# Altium PCB driverV1.1.PcbDoc (part 2 of 2)
Units mil, origin at the board's own origin, x right, y up, seen from the top; angles counter-clockwise.
Board outline 6000 x 4000 mil, 2 copper layers (Top Layer, Bottom Layer); 175 components, 117 nets, 501 pads, 586 vias.
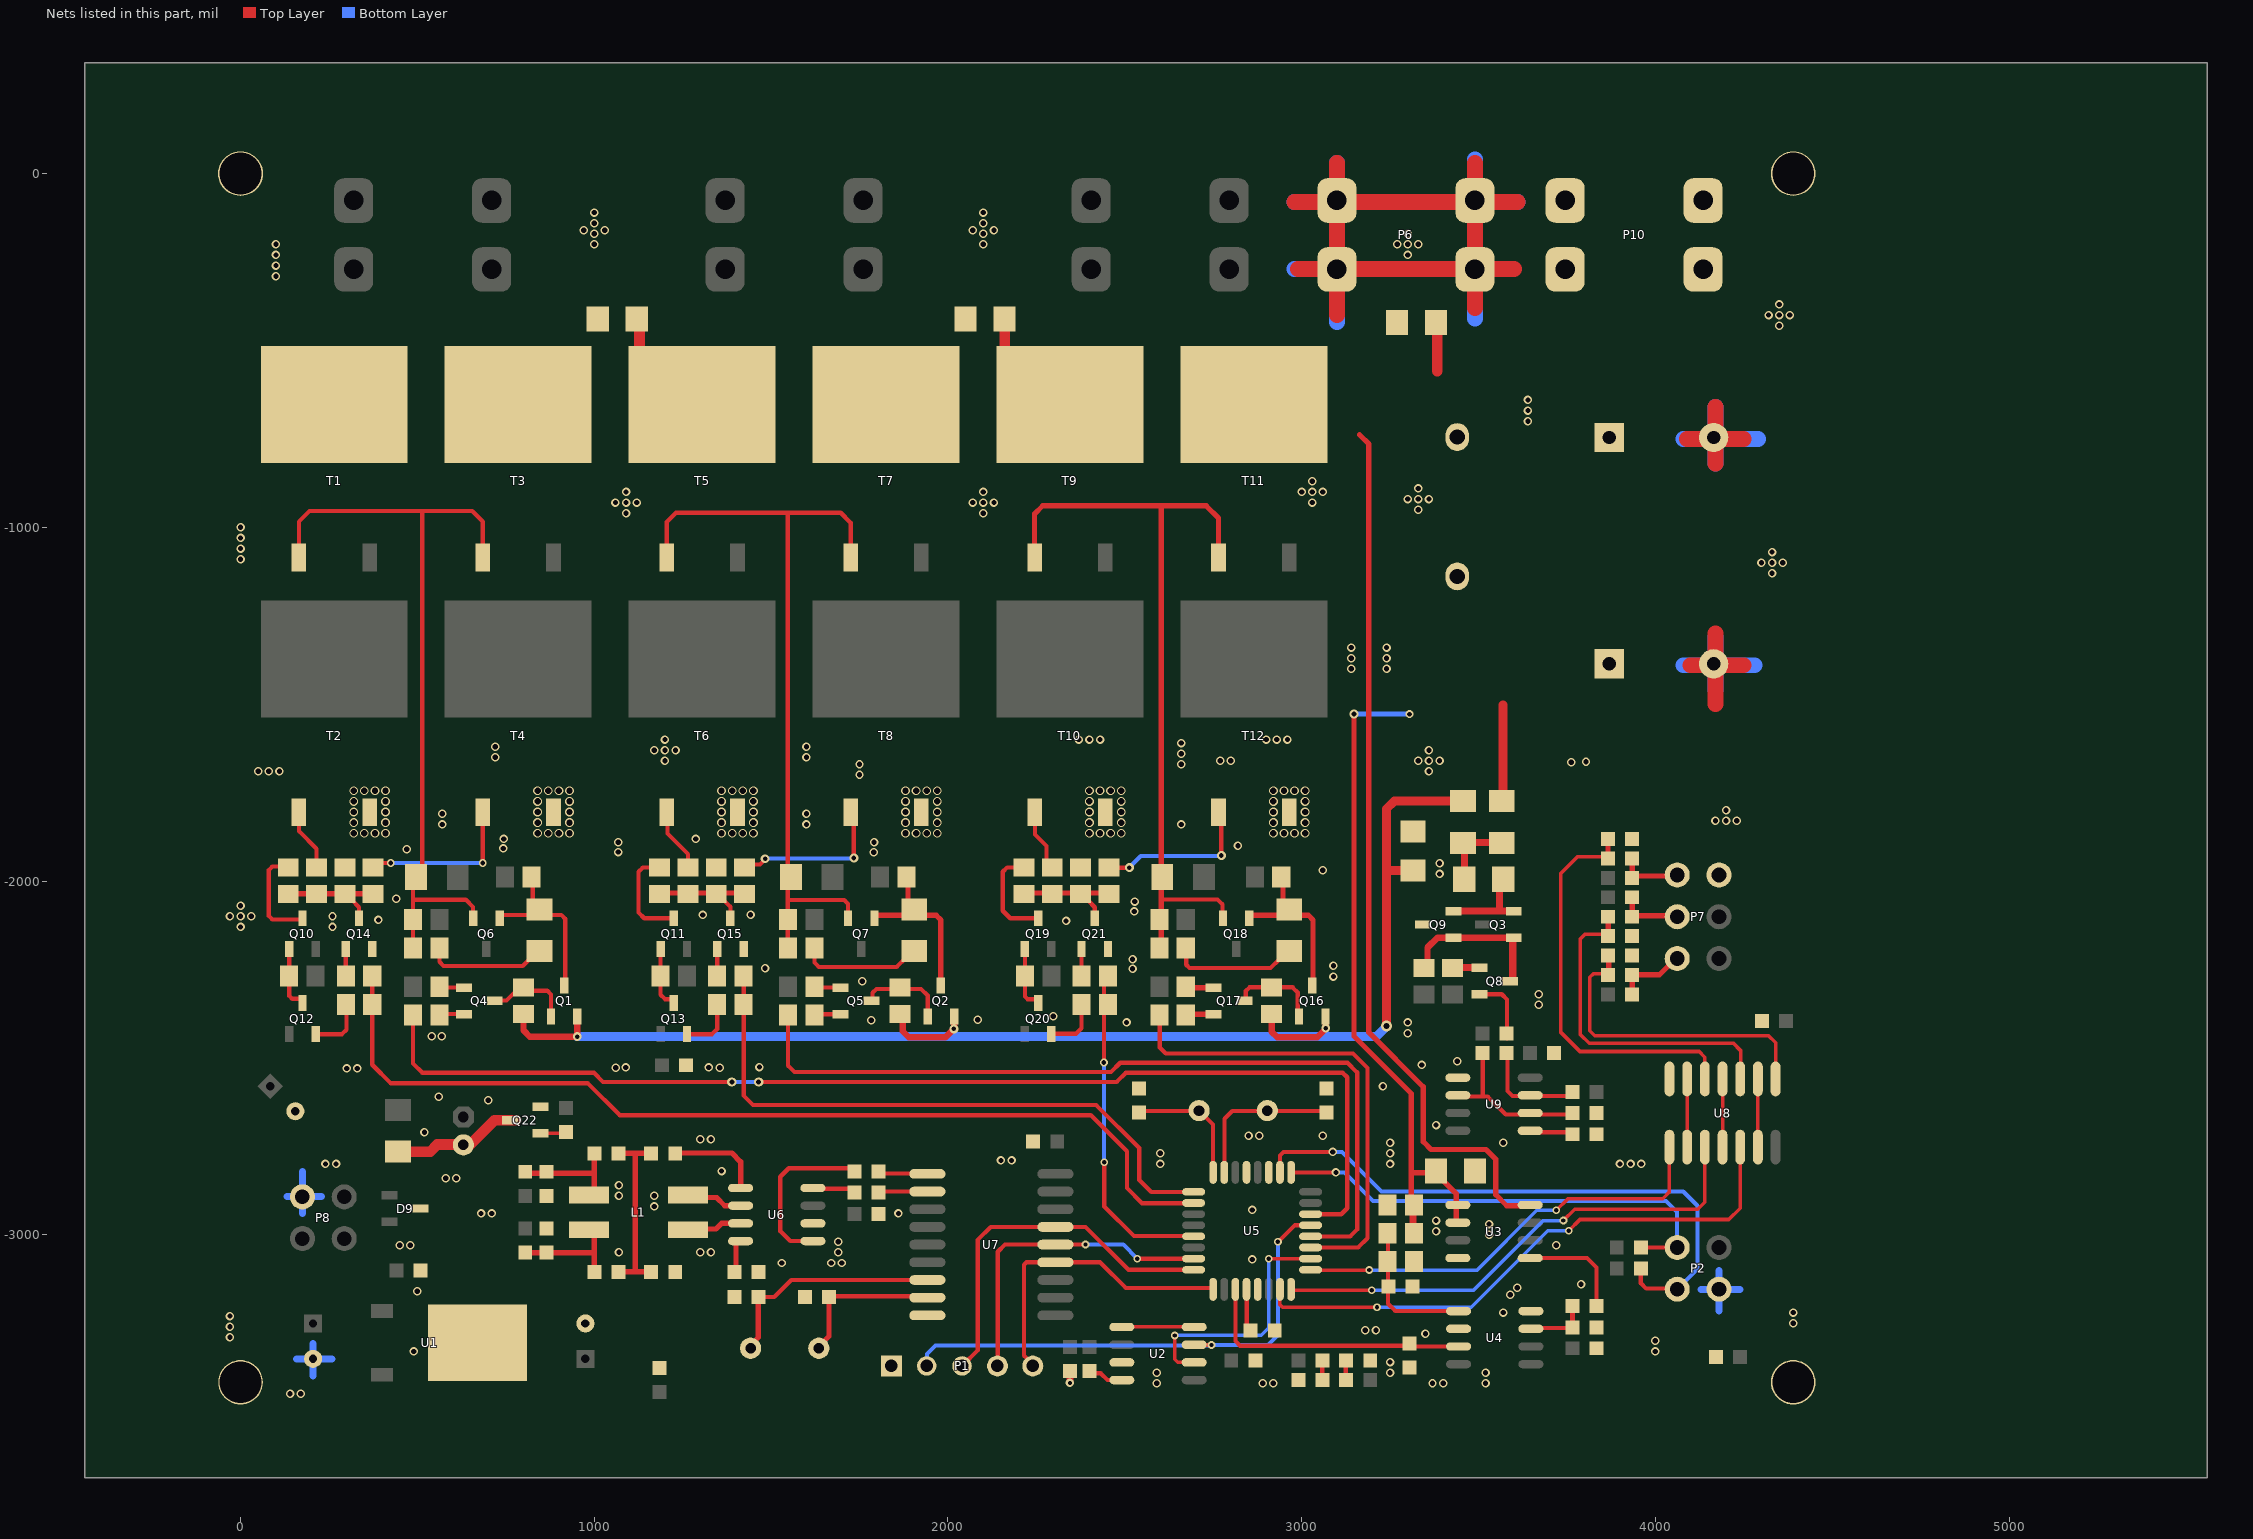
[diagram p2: the nets of this part, all layers, seen from the top]

## Via types
v1: diameter 24, hole 15, Top Layer to Bottom Layer, 237 vias
v2: diameter 25, hole 20, Top Layer to Bottom Layer, 210 vias
v3: diameter 25, hole 18, Top Layer to Bottom Layer, 84 vias
v4: diameter 22, hole 12, Top Layer to Bottom Layer, 14 vias
v5: diameter 22, hole 13, Top Layer to Bottom Layer, 12 vias
v6: diameter 25, hole 13, Top Layer to Bottom Layer, 12 vias
v7: diameter 30, hole 15, Top Layer to Bottom Layer, 5 vias
v8: diameter 23, hole 13, Top Layer to Bottom Layer, 5 vias
v9: diameter 26, hole 14, Top Layer to Bottom Layer, 4 vias
v10: diameter 25, hole 15, Top Layer to Bottom Layer, 1 vias
v11: diameter 30, hole 17, Top Layer to Bottom Layer, 1 vias
v12: diameter 24, hole 12, Top Layer to Bottom Layer, 1 vias

## Nets (pads, with @x,y where several pads share a name; then routed paths per layer and width w, separated by ;. In a path a pad name is that pad's centre, name@x,y a point inside that pad or via, vN(x,y) a via of type N, cw(c..) or ccw(c..) an arc to the next point about the centre after c; other vN are vias at no path point) (continued)
GND: C1.2 C2.2 C4.2 C7.2 C8.2 C9.1 C10.1 C11.1 C12.1 C13.1 C14.2 C15.2 C16.1 C17.1 C19.1 C20.2 C21.1 C22.2 C23.1 C24.1 C25.2 C26.1 C27.1 C28.2 C29.2 C30.2 C31.2 C32.2 C33.1 C34.1 C35.1 C36.2 C37.2 C38.2 C39.2 C40.1 C41.1 C42.1 C43.1 C44.1 C45.1 D9.3 D10.2 D11.2 P1.1 P2.2 P6.1 P7.1 P8.2 pad.0 pad.1 pad.2 pad.3 Q9.3 Q14.1 Q15.1 Q21.1 Q22.1 R51.1 R63.2 T2.3 T4.3 T6.3 T8.3 T10.3 T12.3 U1.4 U2.3 U3.4 U4.4 U5.3 U5.5 U5.21 U6.2 U7.9 U8.7 U9.1 | length 6258
  Top Layer w20: v12(2345,-3419) C27.1@2345,-3392
  Top Layer w45: 2980,-80 3610,-80 ; 2990,-270 3600,-270 ; 3100,-400 3100,30 ; 3490,-380 3490,30 ; 4090,-750 4250,-750 ; 4100,-1390 4250,-1390 ; 4170,-1500 4170,-1300 ; 4170,-820 4170,-660
  Bottom Layer w20: 132,-2892 229,-2892 ; 159,-3351 258,-3351 ; 175,-2940 175,-2822 ; 205,-3400 205,-3308 ; 4129,-3155 4240,-3155 ; 4180,-3216 4180,-3102
  Bottom Layer w45: 2980,-270 3580,-270 ; 2980,-80 3610,-80 ; 3100,-420 3100,30 ; 3490,-410 3490,40 ; 4080,-1390 4280,-1390 ; 4080,-750 4290,-750 ; 4170,-1460 4170,-1310 ; 4170,-820 4170,-660
  other v1: 140,-3450 170,-3450 2590,-3420 2890,-3420 2920,-3420 3370,-3420 3400,-3420 3520,-3420 2590,-3390 3250,-3390 3520,-3390 3250,-3360 490,-3330 4000,-3330 4000,-3300 -30,-3290 3350,-3280 3180,-3270 3210,-3270 -30,-3260 4390,-3250 -30,-3230 3570,-3220 4390,-3220 3590,-3170 500,-3160 3610,-3150 3790,-3140 1530,-3080 1670,-3080 1700,-3080 2860,-3070 1070,-3050 1300,-3050 1330,-3050 1690,-3050 450,-3030 480,-3030 3720,-3030 1690,-3020 3530,-3000 3380,-2990 3530,-2970 3380,-2960 680,-2940 710,-2940 1860,-2940 2860,-2930 1170,-2920 1070,-2890 1170,-2890 1070,-2860 580,-2840 610,-2840 1360,-2820 240,-2800 270,-2800 2600,-2800 3250,-2800 3900,-2800 3930,-2800 3960,-2800 2150,-2790 2180,-2790 2600,-2770 3250,-2770 3250,-2740 3570,-2740 1300,-2730 1330,-2730 2850,-2720 2880,-2720 3060,-2720 520,-2710 3380,-2690 700,-2620 560,-2610 3230,-2580 300,-2530 330,-2530 1061,-2528 1355,-2528 1089,-2527 1324,-2527 1467,-2526 3340,-2520 3440,-2510 541,-2439 569,-2439 3300,-2430 2505,-2400 3300,-2400 1783,-2394 2084,-2392 2298,-2382 3670,-2350 3670,-2320 1758,-2283 3090,-2270 2522,-2248 1483,-2247 3090,-2240 2522,-2221 0,-2130 260,-2130 2334,-2113 390,-2110 -30,-2100 0,-2100 30,-2100 260,-2100 1307,-2096 1442,-2095 2527,-2086 0,-2070 2528,-2058 440,-2050 3390,-1980 3060,-1970 3390,-1950 1790,-1919 1068,-1918 470,-1910 743,-1908 2820,-1900 1068,-1890 1791,-1890 744,-1881 1287,-1881 570,-1840 1600,-1840 2660,-1840 4170,-1830 4200,-1830 4230,-1830 570,-1810 1600,-1810 4200,-1800 1750,-1700 50,-1690 80,-1690 110,-1690 3360,-1690 1750,-1670 2660,-1670 3762,-1664 3804,-1663 1200,-1660 2770,-1660 2800,-1660 3330,-1660 3360,-1660 3390,-1660 720,-1650 1600,-1650 2660,-1640 1170,-1630 1200,-1630 1230,-1630 3360,-1630 720,-1620 1600,-1620 2660,-1610 1200,-1600 2370,-1600 2400,-1600 2430,-1600 2900,-1600 2930,-1600 2960,-1600 3140,-1400 3240,-1400 3140,-1370 3240,-1370 3140,-1340 3240,-1340 4330,-1130 4300,-1100 4330,-1100 4360,-1100 0,-1090 4330,-1070 0,-1060 0,-1030 0,-1000 1090,-960 2100,-960 3330,-950 1060,-930 1090,-930 1120,-930 2070,-930 2100,-930 2130,-930 3030,-930 3300,-920 3330,-920 3360,-920 1090,-900 2100,-900 3000,-900 3030,-900 3060,-900 3330,-890 3030,-870 3640,-700 3640,-670 3640,-640 4350,-430 4320,-400 4350,-400 4380,-400 4350,-370 100,-290 100,-260 100,-230 3300,-230 100,-200 1000,-200 2100,-200 3270,-200 3300,-200 3330,-200 1000,-170 2100,-170 3300,-170 970,-160 1030,-160 2070,-160 2130,-160 1000,-140 2100,-140 1000,-110 2100,-110
  other v3: 320,-1865 350,-1865 380,-1865 410,-1865 840,-1865 870,-1865 900,-1865 930,-1865 1360,-1865 1390,-1865 1420,-1865 1450,-1865 1880,-1865 1910,-1865 1940,-1865 1970,-1865 2400,-1865 2430,-1865 2460,-1865 2490,-1865 2920,-1865 2950,-1865 2980,-1865 3010,-1865 320,-1835 410,-1835 840,-1835 930,-1835 1360,-1835 1450,-1835 1880,-1835 1970,-1835 2400,-1835 2490,-1835 2920,-1835 3010,-1835 320,-1805 410,-1805 840,-1805 930,-1805 1360,-1805 1450,-1805 1880,-1805 1970,-1805 2400,-1805 2490,-1805 2920,-1805 3010,-1805 320,-1775 410,-1775 840,-1775 930,-1775 1360,-1775 1450,-1775 1880,-1775 1970,-1775 2400,-1775 2490,-1775 2920,-1775 3010,-1775 320,-1745 350,-1745 380,-1745 410,-1745 840,-1745 870,-1745 900,-1745 930,-1745 1360,-1745 1390,-1745 1420,-1745 1450,-1745 1880,-1745 1910,-1745 1940,-1745 1970,-1745 2400,-1745 2430,-1745 2460,-1745 2490,-1745 2920,-1745 2950,-1745 2980,-1745 3010,-1745
HA: U5.23 U8.12 | length 1611.2
  Top Layer w10: U5.23@2938.74,-3154.35 2938.74,-3197.74 2946,-3205 v4(3213,-3205) ; v4(3755,-2989) 3787,-2957 4208,-2957 4240,-2925 U8.12@4240,-2777.46
  Bottom Layer w10: v4(3213,-3205) 3480,-3205 3696,-2989 v4(3755,-2989)
HB: U5.24 U8.10 | length 1402.7
  Top Layer w10: U5.24@2971,-3157 v4(3198,-3157) ; v4(3740,-2960) 3772,-2928 4120,-2928 4140,-2908 U8.10@4140,-2777.46
  Bottom Layer w10: v4(3198,-3157) 3486,-3157 3683,-2960 v4(3740,-2960)
HC: U5.25 U8.8 | length 1213.1
  Top Layer w10: U5.25@3020,-3100 v4(3191,-3100) ; v4(3720,-2931) 3753,-2898 4021,-2898 4040,-2879 U8.8@4040,-2777.46
  Bottom Layer w10: v4(3191,-3100) 3496,-3100 3665,-2931 v4(3720,-2931)
M8_DOG: U2.6 U5.26 | length 702.5
  Top Layer w10: v4@2641,-3290 2641,-3352 2650,-3361 2691.36,-3361 U2.6@2696.36,-3366 ; v4(2907,-3068) U5.26@3008,-3068 ; U5.26@3025.35,-3067.96 U5.26@3032,-3068
  Bottom Layer w10: v4@2639,-3284 2886,-3284 2907,-3263 v4(2907,-3068)
  other v4: 2641,-3285
M8_RST: P1.2 U2.7 U5.29 | length 1444.1
  Top Layer w10: U5.29@3022,-2973 U5.29@3025.36,-2973.02
  Top Layer w12: U2.7@2714,-3312 v4(2745,-3312) ; v5@2933.5,-3020.5 2981,-2973 U5.29@3026,-2973
  Bottom Layer w12: P1.2@1941,-3362 1941,-3337 1965,-3313 v4@2742,-3313 ; v4@2747,-3312 2905,-3312 2933,-3284 v5(2933,-3020)
MISO: P1.3 U5.16 U7.15 | length 1047.6
  Top Layer w12: P1.3@2042,-3369 2084,-3327 2084,-3015 2121,-2978 2389,-2978 2510.24,-3099.24 U5.16@2694.65,-3099.24
MOSI: P1.4 U5.15 U7.14 | length 900.3
  Top Layer w12: P1.4@2141,-3372 2141,-3048 2161,-3028 v4@2387,-3028 ; v4@2536.74,-3067.74 U5.15@2694.65,-3067.74
  Bottom Layer w12: v4(2389,-3028) 2496,-3028 2535,-3067 v4@2535,-3069
  other v4: 2535,-3068
NetC3_1: C3.1 D1.2 D2.1 | length 179.1
  Top Layer w12: D1.2@3565.91,-1889.78 D1.2@3585,-1889
  Top Layer w20: D2.1@3454,-1891 D1.2@3552.94,-1891 ; C3.1@3460,-1975 D2.1@3460,-1914
NetC3_2: C3.2 Q3.1 Q9.1 | length 247.9
  Top Layer w20: Q9.1@3440,-2085 Q3.1@3588.94,-2085 ; 3560,-2078.94 C3.2@3560,-1980
NetC5_1: C5.1 D5.2 Q6.1 R5.2 T1.1 T3.1 | length 2216.2
  Top Layer w12: T1.1@165,-1085.54 165,-984 195,-954 655,-954 685,-984 T3.1@685,-1085.54 ; R5.2@487.6,-2201 D5.2@487.6,-1983 ; 487.6,-2053 637,-2053 657.6,-2073.6 Q6.1@657.6,-2105.36 ; D5.2@514,-1994 514,-954
NetC6_1: C6.1 D6.2 Q7.1 R6.2 T5.1 T7.1 | length 2171.1
  Top Layer w12: T5.1@1206,-1089 1205.93,-1085.52 1205,-1041 1205,-985 1231,-959 1697,-959 1725,-987 T7.1@1725,-1082 ; R6.2@1547,-2177 1547,-962 ; R6.2@1548,-2191 R6.2@1547.98,-2189 ; 1550,-2054 1707,-2054 1717.6,-2064.6 Q7.1@1717.6,-2105.36
NetC9_2: C9.2 Q14.3 R18.2 R20.2 R27.2 | length 304.9
  Top Layer w12: C9.2@315,-2054 335,-2074 Q14.3@335,-2104
  Top Layer w15: R20.2@128.36,-2036 R27.2@375,-2036
NetC11_2: C11.2 Q15.3 R19.2 R21.2 R28.2 | length 313.5
  Top Layer w12: C11.2@1363,-2051 1385,-2073 Q15.3@1385,-2109
  Top Layer w15: R21.2@1173.64,-2034 R28.2@1420,-2034
NetC17_2: C17.2 R31.1 U4.3 | length 158
  Top Layer w12: U4.3@3663,-3264 C17.2@3754,-3264
  Top Layer w15: C17.2@3766,-3266 R31.1@3766,-3199
NetC18_1: C18.1 D8.2 Q18.1 R33.2 T9.1 T11.1 | length 2228.9
  Top Layer w12: 2604,-2052 2762,-2052 2776,-2066 Q18.1@2776,-2095
  Top Layer w15: T9.1@2244,-1091 2244.11,-1085.52 2245,-1041 2245,-962 2268,-939 2730,-939 2765,-974 T11.1@2765,-1086 ; R33.2@2603,-2179 2603,-941.96
NetC19_2: C19.2 Q21.3 R38.2 R39.2 R45.2 | length 308.2
  Top Layer w12: C19.2@2397,-2056 2415,-2074 Q21.3@2415,-2110.4
  Top Layer w15: R39.2@2208.64,-2034 R45.2@2455,-2034
NetC20_1: C20.1 U5.7 Y1.2 | length 446.1
  Top Layer w12: U5.7@2782,-2820 2782,-2672 2804,-2650 C20.1@3071,-2650
NetC21_2: C21.2 L1.3 R41.2 R44.1 | length 308
  Top Layer w15: R41.2@812,-2826 997,-2826 ; L1.3@1000,-2893 R44.1@1000,-2770
NetC22_1: C22.1 U5.8 Y1.1 | length 353.7
  Top Layer w12: C22.1@2547,-2650 2711,-2650 2749.76,-2688.76 U5.8@2749.76,-2823.65
NetC23_2: C23.2 R44.2 R47.2 R48.2 | length 523
  Top Layer w15: R44.2@1063,-2770 R47.2@1158,-2770 ; R48.2@1065,-3105 C23.2@1163,-3105 ; 1116,-3103 1116,-2773
NetC24_2: C24.2 L1.4 R48.1 R50.2 | length 320
  Top Layer w15: R50.2@805,-3051 1000,-3051 ; R48.1@1000,-3106 L1.4@1000,-2981
NetC25_1: C25.1 U5.20 | length 114
  Top Layer w12: C25.1@2845,-3269 U5.20@2845,-3155
NetC30_1: C30.1 U7.7 Y2.2 | length 638.6
  Top Layer w12: C30.1@1463,-3176 1509,-3176 1557,-3128 U7.7@1933,-3128
  Top Layer w15: Y2.2@1445,-3324 1445,-3309 1464,-3290 1464,-3201 C30.1@1463.29,-3183.15
NetC31_1: C31.1 U7.8 Y2.1 | length 432.1
  Top Layer w12: C31.1@1677,-3174 U7.8@1952,-3174
  Top Layer w15: Y2.1@1630,-3321 1664,-3287 C31.1@1664,-3178
NetC33_2: C33.2 R56.1 U8.5 | length 1179.3
  Top Layer w10: R56.1@3876,-1931 3780,-1931 3732,-1979 3732,-2427 3787,-2482 4124,-2482 4140,-2498 U8.5@4140,-2561
  Top Layer w15: R56.1@3866,-1941 C33.2@3866,-1874
NetC34_2: C34.2 R57.1 U8.3 | length 963
  Top Layer w10: C34.2@3856,-2151 3801,-2151 3788,-2164 3788,-2434 3813,-2459 4221,-2459 4241,-2479 U8.3@4241,-2560
  Top Layer w15: C34.2@3867,-2161 R57.1@3867,-2094
NetC35_2: C35.2 R58.1 U8.1 | length 931.2
  Top Layer w10: R58.1@3869,-2262 3825,-2262 3815,-2272 3815,-2423 3829,-2437 4320,-2437 4340,-2457 U8.1@4340,-2573
  Top Layer w15: R58.1@3868,-2272 C35.2@3868,-2205
NetC38_1: C38.1 U9.5 | length 91
  Top Layer w12: U9.5@3654,-2710 3745,-2710
NetC39_1: C39.1 R60.1 U9.2 U9.6 | length 443.1
  Top Layer w12: U9.2@3441.06,-2609 3526,-2609 3577,-2660 C39.1@3753,-2660 ; 3512,-2606 R60.1@3512,-2496
NetC43_2: C43.2 R62.1 R63.1 U4.5 | length 392.7
  Top Layer w12: R62.1@3243.74,-2996.04 R62.1@3244,-2988 ; R62.1@3244,-3001 3244,-3195 3265,-3216 U4.5@3426,-3216
NetD3_1: D3.1 Q1.3 Q6.2 R11.2 | length 479.6
  Top Layer w12: Q6.2@733,-2096 907,-2096 918,-2107 Q1.3@918,-2282 ; D3.1@826,-2104 R11.2@826,-1989
NetD3_2: D3.2 R5.1 | length 312.3
  Top Layer w12: R5.1@562.4,-2189 562.4,-2228.4 574,-2240 798,-2240 D3.2@821,-2217
NetD4_1: D4.1 Q2.3 Q7.2 R12.2 | length 421.4
  Top Layer w15: Q7.2@1797,-2097 1967,-2097 1980,-2110 Q2.3@1980,-2289 ; D4.1@1887,-2059 R12.2@1887,-2005
NetD4_2: D4.2 R6.1 | length 305
  Top Layer w12: R6.1@1622.4,-2200 1622.4,-2230.4 1635,-2243 1855,-2243 D4.2@1881,-2217
NetD7_1: D7.1 Q16.3 Q18.2 R35.2 | length 436
  Top Layer w15: Q18.2@2851.96,-2096.6 3018.6,-2096.6 3032,-2110 Q16.3@3032,-2298 ; D7.1@2947.6,-2067.04 R35.2@2947.6,-2004.64
NetD7_2: D7.2 R33.1 | length 331.6
  Top Layer w12: R33.1@2673.6,-2182.64 2673.6,-2236.6 2683,-2246 2912,-2246 D7.2@2937,-2221
NetD9_1: 
NetD10_1: D10.1 R49.1 | length 68
  Top Layer w12: R49.1@3125,-3416 D10.1@3125,-3348
NetD11_1: D11.1 R52.1 | length 66
  Top Layer w12: D11.1@3058,-3416 R52.1@3058,-3350
NetD12_1: D12.1 P9.2 Q22.3 | length 364.9
  Top Layer w30: D12.1@440,-2766 D12.1@445.02,-2765.9 ; D12.1@457,-2765.06 535.94,-2765.06 556,-2745 649,-2745 718,-2676 Q22.3@780,-2676
NetL1_1: L1.1 U6.7 | length 139.6
  Top Layer w15: L1.1@1306,-2984 1344,-2984 1360,-2968 U6.7@1439,-2968
NetL1_2: L1.2 U6.6 | length 114.5
  Top Layer w15: L1.2@1313,-2895 1346,-2895 1369,-2918 U6.6@1418,-2918
NetP7_4: P7.4 R55.1 R58.2 | length 202
  Top Layer w15: R55.1@3935,-2332 3935,-2265 4012,-2265 P7.4@4053,-2224
NetP7_5: P7.5 R54.1 R57.2 | length 189
  Top Layer w15: R57.2@3935,-2110 R54.1@3935,-2043 ; R57.2@3936,-2098 P7.5@4058,-2098
NetP7_6: P7.6 R53.1 R56.2 | length 189
  Top Layer w15: R53.1@3932,-1986 P7.6@4054,-1986 ; R53.1@3935,-1998 R56.2@3935,-1931
NetQ1_2: Q1.2 Q4.3 R1.1 | length 240.3
  Top Layer w12: Q4.3@715.36,-2338 752,-2338 780,-2310 867,-2310 877.6,-2320.6 Q1.2@877.6,-2382.64
NetQ2_2: Q2.2 Q5.3 R2.1 | length 246.3
  Top Layer w12: Q5.3@1783.5,-2337.04 Q5.3@1784,-2337 ; Q5.3@1787,-2342.4 1787,-2316 1798,-2305 1924,-2305 1943,-2324 Q2.2@1943,-2375
NetQ3_2: Q3.2 Q8.3 Q9.2 R7.1 | length 408.6
  Top Layer w18: R7.1@3356,-2236 3356,-2188 3384,-2160 Q3.2@3590,-2160
  Top Layer w20: Q8.3@3597,-2279 Q3.2@3597,-2164
NetQ4_1: Q4.1 R13.2 | length 69
  Top Layer w12: R13.2@562.36,-2376 Q4.1@631.36,-2376
NetQ4_2: Q4.2 R8.1 | length 78
  Top Layer w12: R8.1@553.36,-2301 Q4.2@631.36,-2301
NetQ5_1: Q5.1 R14.2 | length 51
  Top Layer w12: R14.2@1637,-2377 Q5.1@1688,-2377
NetQ5_2: Q5.2 R9.1 | length 51
  Top Layer w12: R9.1@1637,-2301 Q5.2@1688,-2301
NetQ8_1: Q8.1 R17.2 | length 193.2
  Top Layer w12: Q8.1@3504,-2320 3566,-2320 3581,-2335 R17.2@3581,-2445
NetQ8_2: Q8.2 R10.1 | length 79.9
  Top Layer w20: R10.1@3428,-2245 Q8.2@3507.94,-2245
NetQ10_2: Q10.2 Q12.3 R15.2 | length 164.7
  Top Layer w12: Q10.2@138,-2192.6 138,-2325 146,-2333 Q12.3@167,-2333
NetQ10_3: Q10.3 R20.1 | length 298.7
  Top Layer w12: R20.1@135,-1959 134.83,-1959.01 134.84,-1961.6 134.86,-1963.86 130.1,-1959.1 89.9,-1959.1 80,-1969 80,-2099 90,-2109 175,-2109 Q10.3@175,-2105.36
NetQ11_2: Q11.2 Q13.3 R16.2 | length 167.5
  Top Layer w12: Q11.2@1187.6,-2192.64 1187.6,-2321.6 1200,-2334 Q13.3@1221,-2334
NetQ11_3: Q11.3 R21.1 | length 286.9
  Top Layer w12: R21.1@1185,-1961.6 1137.4,-1961.6 1125,-1974 1125,-2089 1141.36,-2105.36 Q11.3@1225,-2105.36
NetQ12_1: Q12.1 R22.2 | length 162.6
  Top Layer w12: Q12.1@215,-2433 287,-2433 299.6,-2420.4 R22.2@299.6,-2347.64
NetQ13_1: Q13.1 R23.2 | length 157.4
  Top Layer w12: Q13.1@1267,-2433 1333,-2433 1347.6,-2418.4 R23.2@1347.6,-2347.64
NetQ14_2: Q14.2 R25.1 | length 62.4
  Top Layer w12: R25.1@297.6,-2255.04 Q14.2@297.6,-2192.64
NetQ15_2: Q15.2 R26.1 | length 62.4
  Top Layer w12: R26.1@1347.6,-2255.04 Q15.2@1347.6,-2192.64
NetQ16_2: Q16.2 Q17.3 R32.1 | length 247.3
  Top Layer w12: Q17.3@2842,-2339 2842,-2311 2852.4,-2300.6 2974.6,-2300.6 2989,-2315 Q16.2@2989,-2377
NetQ17_1: Q17.1 R36.2 | length 62.4
  Top Layer w15: R36.2@2677.96,-2376.6 Q17.1@2740.36,-2376.6
NetQ17_2: Q17.2 R34.1 | length 62.4
  Top Layer w15: R34.1@2683.96,-2301.6 Q17.2@2746.36,-2301.6
NetQ19_2: Q19.2 Q20.3 R37.2 | length 165.4
  Top Layer w12: Q19.2@2217.6,-2192.64 2217.6,-2326.6 2225,-2334 Q20.3@2246,-2334
NetQ19_3: Q19.3 R39.1 | length 284
  Top Layer w12: R39.1@2215,-1961.6 2167.4,-1961.6 2155,-1974 2155,-2084 2176.36,-2105.36 Q19.3@2255,-2105.36
NetQ20_1: Q20.1 R40.2 | length 156.8
  Top Layer w12: Q20.1@2296,-2432 2362,-2432 2377.6,-2416.4 R40.2@2377.6,-2347.64
NetQ21_2: Q21.2 R42.1 | length 62.4
  Top Layer w12: R42.1@2377.6,-2255.04 Q21.2@2377.6,-2192.64
NetQ22_2: Q22.2 R61.1 | length 65
  Top Layer w10: Q22.2@855,-2713 R61.1@920,-2713
NetR18_1: R18.1 T2.1 | length 170.7
  Top Layer w12: T2.1@165,-1809 165,-1859 215,-1909 R18.1@215,-1959
NetR19_1: R19.1 T6.1 | length 149
  Top Layer w12: T6.1@1207,-1832 1207,-1866 1265,-1924 R19.1@1265,-1957
NetR24_1: R24.1 U2.4 | length 100.4
  Top Layer w12: R24.1@2402,-3385 2409,-3392 2432,-3392 2451,-3411 U2.4@2491.64,-3411
NetR27_1: R27.1 T4.1 | length 430
  Top Layer w12: R27.1@395,-1949 v5(425,-1949) ; v5(685,-1949) T4.1@685,-1809
  Bottom Layer w12: v5(425,-1949) v5(685,-1949)
NetR28_1: R28.1 T8.1 | length 415.7
  Top Layer w12: R28.1@1430,-1961.6 1438.6,-1953 1469,-1953 1480,-1942 v6@1480,-1940 ; T8.1@1724,-1800 T8.1@1724.11,-1805.55 ; v6(1734,-1935) T8.1@1734,-1833
  Bottom Layer w12: v6@1485,-1936 v6@1733,-1936
  other v6: 1483,-1937
NetR31_2: R31.2 U3.5 | length 286.2
  Top Layer w12: U3.5@3658,-3066 3807,-3066 3834,-3093 R31.2@3834,-3192
NetR38_1: R38.1 T10.1 | length 177.5
  Top Layer w12: T10.1@2246.4,-1799.96 2246.4,-1868.4 2279,-1901 R38.1@2279,-1964
NetR43_1: R43.1 U6.1 | length 452.2
  Top Layer w12: U6.1@1607,-3018 1554,-3018 1526,-2990 1526,-2836 1550,-2812 R43.1@1721,-2812 ; U6.1@1618.34,-3017.02 U6.1@1619,-3017
NetR43_2: R43.2 U7.1 | length 111
  Top Layer w12: R43.2@1814,-2827 U7.1@1925,-2827
NetR45_1: R45.1 T12.1 | length 442.1
  Top Layer w12: R45.1@2451.64,-1962.4 v6@2514.04,-1962.4 ; v6(2773,-1928) T12.1@2773,-1820.6
  Bottom Layer w12: v6@2513,-1961 2545,-1929 v6@2772,-1929
  other v6: 2513,-1962
NetR46_1: R46.1 U7.2 | length 111
  Top Layer w12: R46.1@1816,-2878 U7.2@1927,-2878
NetR46_2: R46.2 U6.4 | length 120
  Top Layer w12: U6.4@1601,-2870 R46.2@1721,-2870
NetR47_1: R47.1 U6.5 | length 265.4
  Top Layer w15: R47.1@1230,-2769 1389,-2769 1414,-2794 U6.5@1414,-2865
NetR51_2: R51.2 U6.8 | length 65
  Top Layer w15: R51.2@1401,-3088 U6.8@1401,-3023
NetR59_1: R59.1 R60.2 U9.7 | length 289.8
  Top Layer w12: R60.2@3582,-2489 3582,-2594 3596,-2608 R59.1@3761,-2608
NetU2_1: U2.1 U2.8 | length 179
  Top Layer w10: U2.1@2515,-3260 U2.8@2694,-3260
NetU8_2: U8.2 U8.13 | length 192
  Top Layer w10: U8.13@4289,-2767 U8.2@4289,-2575
NetU8_4: U8.4 U8.11 | length 192
  Top Layer w10: U8.11@4191,-2779 U8.4@4191,-2587
NetU8_6: U8.6 U8.9 | length 192
  Top Layer w10: U8.9@4090,-2776 U8.6@4090,-2584
QEA: P2.4 R4.2 U5.1 | length 1316.2
  Top Layer w12: U5.1@2976.24,-2824 v1@3098,-2824 ; R4.2@3966,-3036 P2.4@4048,-3036
  Bottom Layer w12: v1(3097,-2824) 3121,-2824 3202,-2905 4030,-2905 4061,-2936 P2.4@4061,-3038
QEB: P2.3 R3.2 U5.2 | length 1688.8
  Top Layer w12: U5.2@2939,-2825 U5.2@2938.99,-2823.64 ; U5.2@2939,-2810 2939,-2776 2949,-2766 v1(3088,-2766) ; R3.2@3959,-3104 3959,-3137 3974,-3152 4060,-3152 P2.3@4065,-3157 ; R3.2@3960.99,-3096.16 R3.2@3961,-3096
  Bottom Layer w12: v1(3088,-2766) 3114,-2766 3226,-2878 4079,-2878 4119,-2918 4119,-3097 P2.3@4062.5,-3153.5
SCK: P1.5 U5.17 U7.13 | length 864.4
  Top Layer w12: P1.5@2241,-3368 2215,-3342 2215,-3085 2222,-3078 2430,-3078 2503,-3151 U5.17@2746.41,-3151 ; U7.13@2298,-3079 U7.13@2304.12,-3078.9
STEUER_A+: R13.1 U5.30 | length 3288.9
  Top Layer w12: R13.1@487.6,-2379 487.6,-2515.6 514,-2542 999,-2542 1025,-2568 v9(1389,-2568) ; v9(1465,-2568) 2477,-2568 2503,-2542 3116,-2542 3129,-2555 3129,-2925 3112,-2942 U5.30@3031,-2942
  Bottom Layer w12: v9@1390,-2568 v9@1464,-2568
STEUER_A-: R22.1 R25.2 U5.10 | length 2804.1
  Top Layer w12: R25.2@372.4,-2269 372.4,-2519.4 425,-2572 982,-2572 1072,-2662 2404,-2662 2506,-2764 2506,-2868 2549,-2911 U5.10@2703,-2911
STEUER_B+: R14.1 U5.28 | length 2362.2
  Top Layer w12: R14.1@1548,-2382 1548,-2522 1566,-2540 2461,-2540 2487,-2514 3130,-2514 3157,-2541 3157,-2985 3137.25,-3004.75 U5.28@3025.35,-3004.75
STEUER_B-: R23.1 R26.2 U5.9 | length 1767
  Top Layer w12: R26.2@1422.4,-2269 1422.4,-2606.4 1449,-2633 2419,-2633 2541,-2755 2541,-2845 2575,-2879 2685,-2879 U5.9@2686,-2878
STEUER_C+: R36.1 U5.27 | length 1356.5
  Top Layer w12: R36.1@2599,-2378 2599,-2471 2616,-2488 3145,-2488 3186,-2529 3186,-3010 3159.76,-3036.24 U5.27@3025.35,-3036.24
STEUER_C-: R40.1 R42.2 U5.13 | length 944.5
  Top Layer w12: v5@2441,-2511 R42.2@2441,-2268 ; v5(2442,-2795) 2442,-2920 2526,-3004 U5.13@2697,-3004 ; U5.13@2691,-3006 U5.13@2694.68,-3005.89
  Bottom Layer w12: v5(2441,-2513) 2441,-2795 v5(2442,-2795)
VCC: C13.2 C15.1 C28.1 C29.1 D1.1 P10.1 R29.2 R62.2 U3.1 U3.2 | length 2149.4
  Top Layer w15: v10@3148,-1529 3148,-2439 3310,-2601 3310,-2917 C13.2@3308,-2919 ; 3313,-2825 C15.1@3382,-2825 ; C13.2@3315,-2915 3315.08,-2916.16 C13.2@3315.27,-2919 ; C15.1@3395,-2845 3398,-2845 3437,-2884 3437,-2959 U3.2@3448,-2970
  Top Layer w20: R62.2@3315,-2986.6 C13.2@3315,-2935
  Top Layer w25: D1.1@3569.12,-1764.12 3569.12,-1502
  Bottom Layer w15: v10(3148,-1528) v8@3304,-1528
  other v8: 3305,-1528
VH: C4.1 D2.2 Q1.1 Q2.1 Q16.1 R1.2 R2.2 R32.2 | length 4002.7
  Top Layer w12: 3326,-1773 3326.94,-1773.94
  Top Layer w18: R1.2@800,-2387 800,-2422 818,-2440 v6(952,-2440) ; v6@952,-2441 952.4,-2441 Q1.1@952.4,-2389 ; R2.2@1872,-2376.4 1872,-2425 1889,-2442 1993,-2442 2018,-2417 2018,-2383.6 Q2.1@2017.4,-2383 ; R32.2@2916,-2375 2916,-2427 2931,-2442 3044,-2442 3068,-2418 3068,-2385.24 Q16.1@3069,-2384.24 ; C4.1@3315,-1970.01 C4.1@3320,-1970
  Top Layer w25: v11@3240,-2409 3240,-1796 3262,-1774 3326,-1774 ; 3250,-1970 C4.1@3300,-1970 ; 3326.94,-1773.94 D2.2@3456,-1773.94
  Bottom Layer w15: 2017,-2445 v6@2017,-2415 ; 3068,-2443 v6@3068,-2413
  Bottom Layer w25: v6@951,-2440 3211,-2440 v11@3240.5,-2410.5
  other v6: 2017,-2418 3068,-2416
  other v11: 3240,-2410
VP: C1.1 C2.1 C14.1 R29.1 T1.2 T3.2 T5.2 T7.2 T9.2 T11.2 U3.8 | length 2816.2
  Top Layer w15: 3163.77,-738.23 3190,-764.46 3190,-2428 3344,-2582 3344,-2737 3366,-2759 3521,-2759 3549,-2787 3549,-2887 3580,-2918 U3.8@3633,-2918
  Top Layer w30: T5.2@1128.12,-501.12 C1.1@1128.12,-406 ; T9.2@2160.12,-501.12 C2.1@2160.12,-406 ; 3383,-558 C14.1@3383,-428
VSA: C42.2 U4.6 U4.7 U5.19 | length 771.5
  Top Layer w12: U5.19@2812,-3152 U5.19@2812.04,-3154.37 ; U5.19@2812.76,-3160 2812.76,-3300.76 2826,-3314 C42.2@3305,-3314 ; C42.2@3313,-3316 U4.7@3443.64,-3316
pads on no net: P7.2 U2.5 U3.3 U3.6 U3.7 U7.3 U7.4 U7.5 U7.6 U7.10 U7.11

## Polygon pours and split planes (outlines as drawn)
GND on Top Layer "Bottom Layer-No Net" (solid, remove dead copper, pour order 1000): -360.67,200.17 4599.33,200.17 4599.33,-1859.83 -241.15,-1859.83
+12V on Top Layer "Bottom Layer-No Net" (solid, remove dead copper, pour order 1000): 120,-2941 120,-3291 460,-3291 460,-3161 460,-3101 440,-3081 240,-3081 240,-2941
GND on Top Layer "Bottom Layer-No Net" (solid, remove dead copper, pour order 1000): 2530,-1740 3160,-1740 3200,-1780 3220,-1800 3220,-2390 2640,-2390 2610,-2420
GND on Top Layer "Bottom Layer-No Net" (solid, remove dead copper, pour order 1001): -120,-1850 4550,-1850 4590,-1890 4590,-3600 -160,-3600 -200,-3560
GND on Bottom Layer "Bottom Layer-No Net" (solid, remove dead copper, pour order 1002): -315,155 -250,220 4690,220 4690,-1700 -310,-1700
GND on Bottom Layer "Bottom Layer-No Net" (solid, remove dead copper, pour order 1003): -450,-1620 4740,-1620 5440,-2320 4960,-2800 4960,-3880 130,-3880 -270,-3480

## Keep-outs
Keep-Out Layer:
  lines w7.87: -95,-3462 -95,46 ; -57,-3502 4442,-3502 ; -57,86 4438,86 ; 4474.33,-3469 4474.33,49.67
  lines w8: -95,-3462 ccw(c-55,-3462) -55,-3502 ; -95,46 cw(c-55,46) -55,86 ; 4438,86 cw(c4438,49.67) 4474.33,49.67 ; 4440,-3502 ccw(c4440,-3467.67) 4474.33,-3467.67

## Other copper
Top Layer:
  rectangle net GND: 3590,-2861 3714,-2758
  rectangle net GND: 827.5,-1880.01 967.5,-1720.01
  rectangle net GND: 307.5,-1880.01 447.5,-1720.01
  rectangle net GND: 1340,-1880 1480,-1720
  rectangle net GND: 1862.5,-1874.47 2002.5,-1714.47
  rectangle net GND: 2380,-1880 2520,-1720
  rectangle net VCC: 3675,-421 4210,-1
  rectangle net VSA: 3434,-3323 3458,-3265
  rectangle net A: 255,-1387 472,-990
  rectangle net A: 772,-1390 989,-993
  rectangle net B: 1293,-1388 1510,-991
  rectangle net B: 1815,-1389 2032,-992
  rectangle net C: 2335,-1389 2552,-992
  rectangle net C: 2855,-1365 3072,-991
  rectangle net VCC: 3688,-1398 4026,-279
  rectangle net VCC: 3288,-1543 4026,-1031
  rectangle net VP: 139,-805 3592,-503
  rectangle net +5V: 4345,-2771 4395,-2741
  rectangle net +5V: 2019,-3022 2045,-3008
  rectangle net +5V: 355,-3491 465,-3366
  rectangle net GND: 2900,-1880 3040,-1720
  rectangle net GND: 2850,-1910 3080,-1660
  rectangle net GND: -75,-102 101,66
  rectangle net GND: 4279,-102 4455,66
  rectangle net GND: 280,-1910 480,-1690
  rectangle net GND: 540,-1900 590,-1810
  rectangle net GND: 790,-1920 1020,-1690
  rectangle net GND: 1310,-1900 1510,-1680
  rectangle net GND: 1830,-1910 2030,-1680
  rectangle net GND: 2350,-1910 2560,-1680
  rectangle net GND: 4305,-3486 4458,-3340
Bottom Layer:
  rectangle net GND: 3594,-2859 3703,-2767
  rectangle net GND: 3386,-2859 3508,-2769
  rectangle net A: 65,-1519 975,-1209
  rectangle net B: 1105,-1519 2015,-1209
  rectangle net C: 2155,-1519 3065,-1209
  rectangle net C: 2275,-1489 2915,9
  rectangle net B: 1235,-1459 1885,9
  rectangle net A: 195,-1429 845,10
  rectangle net GND: 252,-1904 497,-1697
  rectangle net GND: 785,-1906 1014,-1685
  rectangle net GND: 1317,-1899 1503,-1682
  rectangle net GND: 1813,-1924 2043,-1698
  rectangle net GND: 2355,-1900 2544,-1699
  rectangle net GND: 2865,-1902 3074,-1704
  rectangle net GND: 4300,-3486 4458,-3321
  rectangle net GND: 4286,-87 4455,67
  rectangle net GND: -79,-3486 84,-3324
  rectangle net GND: -75,-86 99,66

## Silkscreen, mask and mechanical layers (free items; w line width, h text height)
Top Overlay:
  lines w6: 455,-2080 455,-2070 595,-2070 595,-2075 595,-2415 455,-2415 ; 455,-2075 455,-2415 ; 510,-2415 510,-2600 400,-2600 400,-2415 455,-2415 ; 2565,-2420 2565,-2472.93 cw(c2547.93,-2472.93) 2560,-2485 cw(c2511.72,-2436.72) 2511.72,-2505 2460,-2505 ; 2460,-2505 2335,-2505 2335,-2700 2460,-2700 2460,-2505 ; -85,-2070 -85,-1925 420,-1925 420,-2070 410,-2070 -85,-2070 ; 2560,-2420 2560,-2070 2705,-2070 2705,-2420 2560,-2420
  lines w7.87: 1515,-2611 1515,-2076 1515,-2071 1655,-2071 1655,-2076 1655,-2611
  lines w8: 1515,-2611 1655,-2611 ; 1700,-3116 1700,-2786 1840,-2786 1840,-2791 1840,-3116 1700,-3116
  text "GND" at 3220,20 h78.74
  text "+48V" at 3880,20 h78.74
  text "A" at 105,-140 h160
  text "B" at 1140,-140 h160
  text "C" at 2180,-140 h160
  text "CL" at 400,-3060 h60 r90
  text "CH" at 400,-3160 h60 r90
  text "RS" at 1900,-3480 h60
  text "MI" at 2020,-3480 h60
  text "MO" at 2100,-3480 h60
  text "CK" at 2200,-3480 h60
  text "OOP V1.1" at 3745,-3482 h100
Top Solder:
  rectangle: 2900,-1880 3040,-1740
  rectangle: 2380,-1880 2520,-1740
  rectangle: 1860,-1880 2000,-1740
  rectangle: 1340,-1880 1480,-1740
  rectangle: 820,-1880 960,-1740
  rectangle: 300,-1880 440,-1740
  rectangle: 250,-1271 480,-981
  rectangle: 760,-1271 1000,-981
  rectangle: 1290,-1321 1520,-981
  rectangle: 1810,-1281 2040,-981
  rectangle: 2320,-1331 2570,-981
  rectangle: 2840,-1271 3090,-981
  lines w40: 3440,-1140 3760,-1140 ; 3753,-173 4128.59,-173 cw(c4128.59,-176.41) 4131,-174 ; 3756.68,-1140.37 ccw(c3756.68,-1036.68) 3830,-1110 ; 3834.64,-1105.36 ccw(c3749.29,-1020) 3870,-1020 ; 3869.72,-1020 3869.72,-746 3869.72,-36.08 cw(c3874.08,-36.08) 3871,-33
  lines w50: 113.97,-740 3440,-740 ; 180,-678 cw(c208.97,-706.97) 208.97,-666